# EAGLE board PWM (EAGLE 6.4)
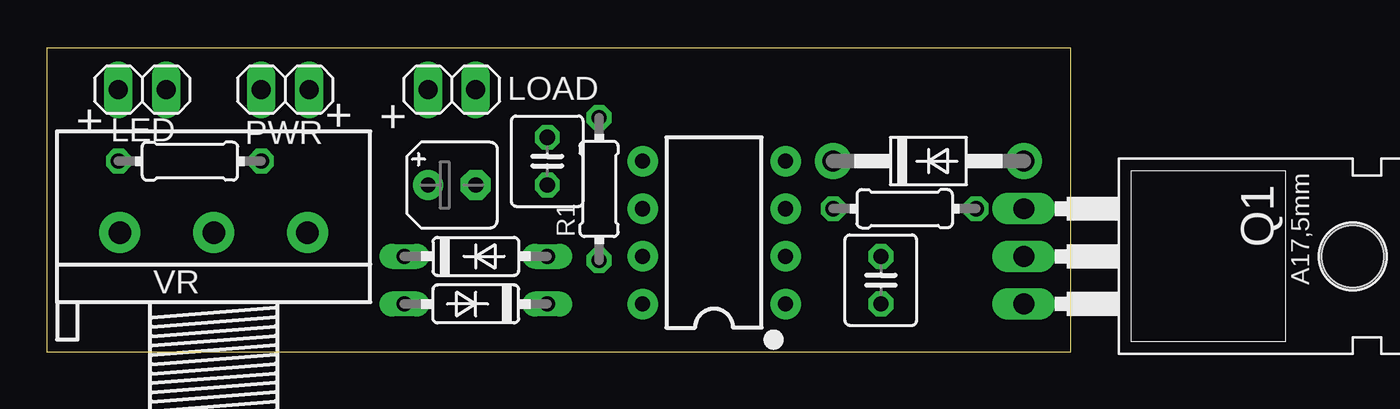
[diagram p0: board, top side]
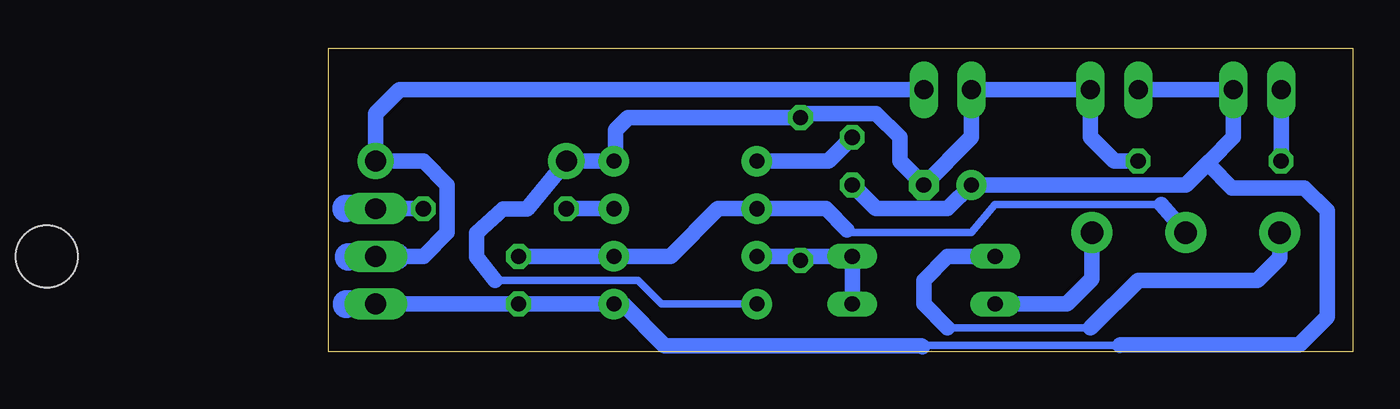
[diagram p1: board, bottom side, seen from below]

Size 54.59 x 16.18 mm. Coordinates in mm from the lower left corner, seen from the top.
Outline: 0,0 54.59,0 54.59,16.18 0,16.18 0,0
Copper layers (1*16): Top 0.035mm / dielectric 1.5mm / Bottom 0.035mm
Design rules "default": minimum track width 10mil, minimum drill 24mil, track to track 8mil, track to pad 8mil, pad to pad 8mil, via to via 8mil, smd to smd 8mil, copper to edge 40mil, drill to drill 8mil, minimum pad ring 10mil, minimum via ring 8mil, stop-mask expansion 4mil, vias tented up to drill 0mil, thermal gap 10mil

## Footprints (pad centres in the part's own frame; a part is rotated, then mirrored left to right if it is on the bottom)
C025-040X050 = drill 0.813 octagon: 1 -1.27,0; 2 1.27,0
B45181A = drill 0.813 pad 1.6: + -1.27,0 | drill 0.813 pad 1.6 octagon: - 1.27,0
DO35-7 = drill 0.813 long: A 3.81,0; C -3.81,0
DO41-10 = drill 1.118 pad 1.93: A 5.08,0; C -5.08,0
DIP08 = drill 0.813 pad 1.626: 1 -3.81,-3.81; 2 -1.27,-3.81; 3 1.27,-3.81; 4 3.81,-3.81; 5 3.81,3.81; 6 1.27,3.81; 7 -1.27,3.81; 8 -3.81,3.81
1X02 = drill 1.016 long: 1 -1.27,0; 2 1.27,0
TO220 = drill 1.118 long: 1 -2.54,-6.35; 2 0,-6.35; 3 2.54,-6.35 | hole 3.302: 0,11.176
0204/7 = drill 0.813 octagon: 1 -3.81,0; 2 3.81,0
3RP/1610N = drill 1.2 pad 2.184: 1 -5,0; 2 0,0; 3 5,0

## Placement (x,y rotation side)
C1  0.01  [C025-040X050]  26.67,10.16 90 top
C2  0.1  [C025-040X050]  44.45,3.81 90 top
C3  [B45181A]  21.59,8.89 0 top
D1  4148  [DO35-7]  22.86,2.54 180 top
D2  4148  [DO35-7]  22.86,5.08 0 top
D3  1N4004  [DO41-10]  46.99,10.16 0 top
IC1  555  [DIP08]  35.56,6.35 90 top
LED  [1X02]  5.08,13.97 0 top
LOAD  [1X02]  21.59,13.97 180 top
PWR  [1X02]  12.7,13.97 0 top
Q1  IRF540  [TO220]  58.42,5.08 270 top
R1  [0204/7]  29.43,8.67 90 top
R2  330  [0204/7]  45.72,7.62 180 top
R3  330  [0204/7]  7.62,10.16 0 top
VR  50k  [3RP/1610N]  8.89,6.35 0 top

## Library data of the parts
C1-C3 R1-R3 = rcl
D1 D2 = diode
D3 = adafruit
IC1 = SparkFun-IC-Special-Function; PROD_ID: IC-09173; PROD_ID_ALT: IC-09173
LED LOAD PWR = pinhead
Q1 = transistor-fet
VR = pot

## Nets
N$1: C2.2 IC1.2 IC1.6 VR.2
N$2: IC1.3 R2.2
N$3: C1.2 IC1.5
N$4: C1.1 C2.1 C3.+ IC1.1 LED.2 PWR.1 Q1.3
N$5: D1.A VR.3
N$6: D2.C VR.1
N$7: D1.C D2.A IC1.7 R1.1
N$8: LED.1 R3.1
N$9: C3.- D3.C IC1.4 IC1.8 LOAD.2 PWR.2 R1.2 R3.2
N$10: Q1.1 R2.1
N$13: D3.A LOAD.1 Q1.2

## Tracks (layer width: path | path; a pad name or v marks a point on that pad's centre or on a via)
N$1
  Bottom 0.406: 10.18,7.86 19.07,7.86 20.32,6.35 26.81,6.35 26.95,6.49
  Bottom 0.813: VR.2 10.18,7.86 | C2.2 IC1.2 36.35,5.08 33.81,7.62 IC1.6 28.08,7.62 26.95,6.49
N$2
  Bottom 0.813: IC1.3 R2.2
N$3
  Bottom 0.813: IC1.5 27.94,10.16 C1.2
N$4
  Bottom 0.406: 12.4,0.33 22.85,0.33 22.92,0.26
  Bottom 0.813: PWR.1 LED.2 6.35,11.43 7.62,10.16 | 7.62,10.16 8.89,8.89 C3.+ 21.59,7.62 25.4,7.62 C1.1 | Q1.3 C2.1 IC1.1 38.89,2.54 36.67,0.31 22.98,0.31 22.92,0.26 | 7.62,10.16 7.62,9.93 6.43,8.74 2.57,8.74 1.35,7.52 1.35,1.84 2.84,0.35 12.37,0.35 12.4,0.33
N$5
  Bottom 0.813: VR.3 13.89,3.89 15.24,2.54 D1.A
N$6
  Bottom 0.406: 13.97,1.27 21.59,1.27
  Bottom 0.813: VR.1 3.89,5 5.08,3.81 11.43,3.81 13.97,1.27 | 21.59,1.27 22.86,2.54 22.86,3.81 21.59,5.08 D2.C
N$7
  Bottom 0.406: R1.1 29.21,5.08
  Bottom 0.813: D1.C D2.A 29.21,5.08 IC1.7
N$8
  Bottom 0.813: R3.1 LED.1
N$9
  Bottom 0.406: IC1.8 36.83,2.54 38.1,3.81 45.72,3.81
  Bottom 0.813: R3.2 12.7,10.16 13.97,11.43 PWR.2 LOAD.2 20.32,11.43 C3.- 24.13,10.16 24.13,11.43 25.4,12.7 29.21,12.7 R1.2 38.61,12.48 39.28,11.81 39.28,10.25 IC1.4 D3.C 44,7.61 45.27,7.61 46.7,6.32 46.7,5.05 45.72,3.81
N$10
  Bottom 0.813: R2.1 Q1.1
N$11
  Bottom 1.422: 51.37,7.67 53.67,7.67 53.67,7.61
N$12
  Bottom 1.422: 50.97,5.08 53.55,5.08 53.55,5.03
N$13
  Bottom 0.813: LOAD.1 50.8,13.97 52.07,12.7 D3.A 49.53,10.16 48.26,8.89 48.26,6.35 49.53,5.08 Q1.2
N$14
  Bottom 1.422: 51.19,2.58 53.65,2.58 53.65,2.49

## Text on the board
tPlace: + | + | +